# Altium PCB Ad Hoc Node PCB.PcbDoc
Units mm, origin at the board's own origin, x right, y up, seen from the top; angles counter-clockwise.
Board outline 152.4 x 101.6 mm, 2 copper layers (Top Layer, Bottom Layer); 32 components, 35 nets, 162 pads, 14 vias.
Unrouted connection lines stored in the file: 5.
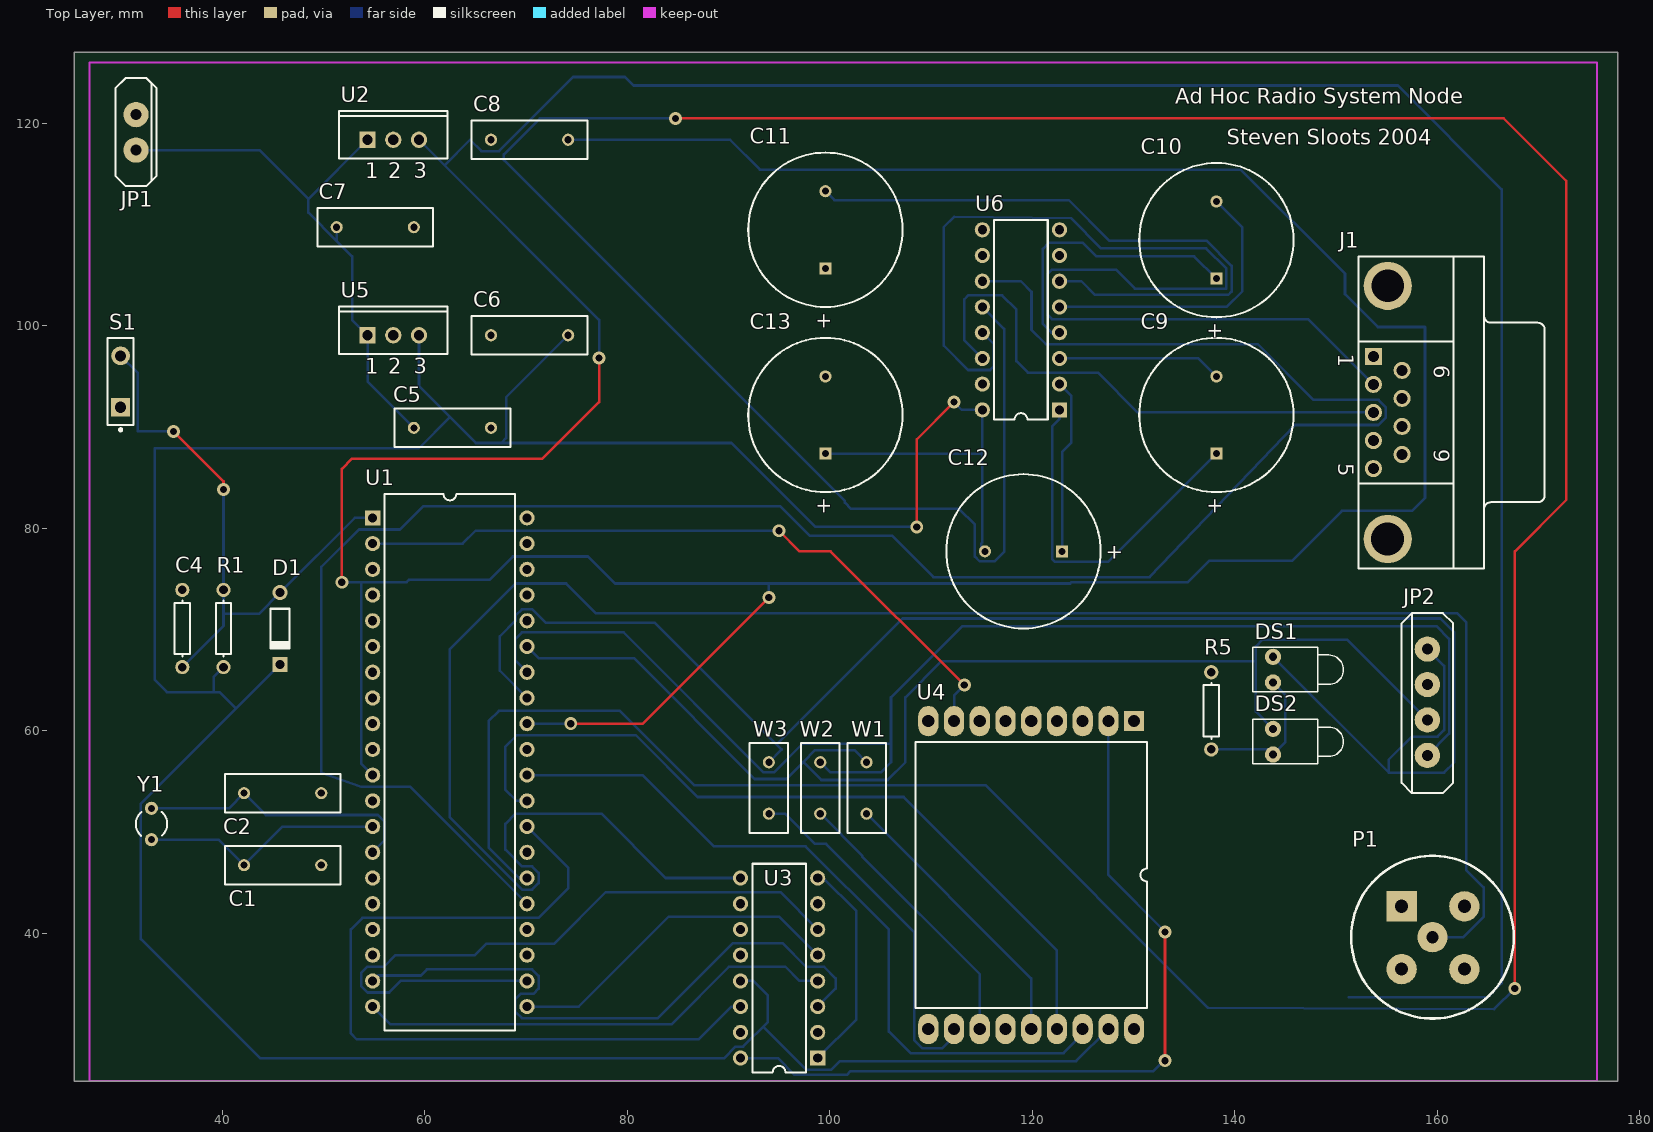
[diagram p0: Top Layer view]
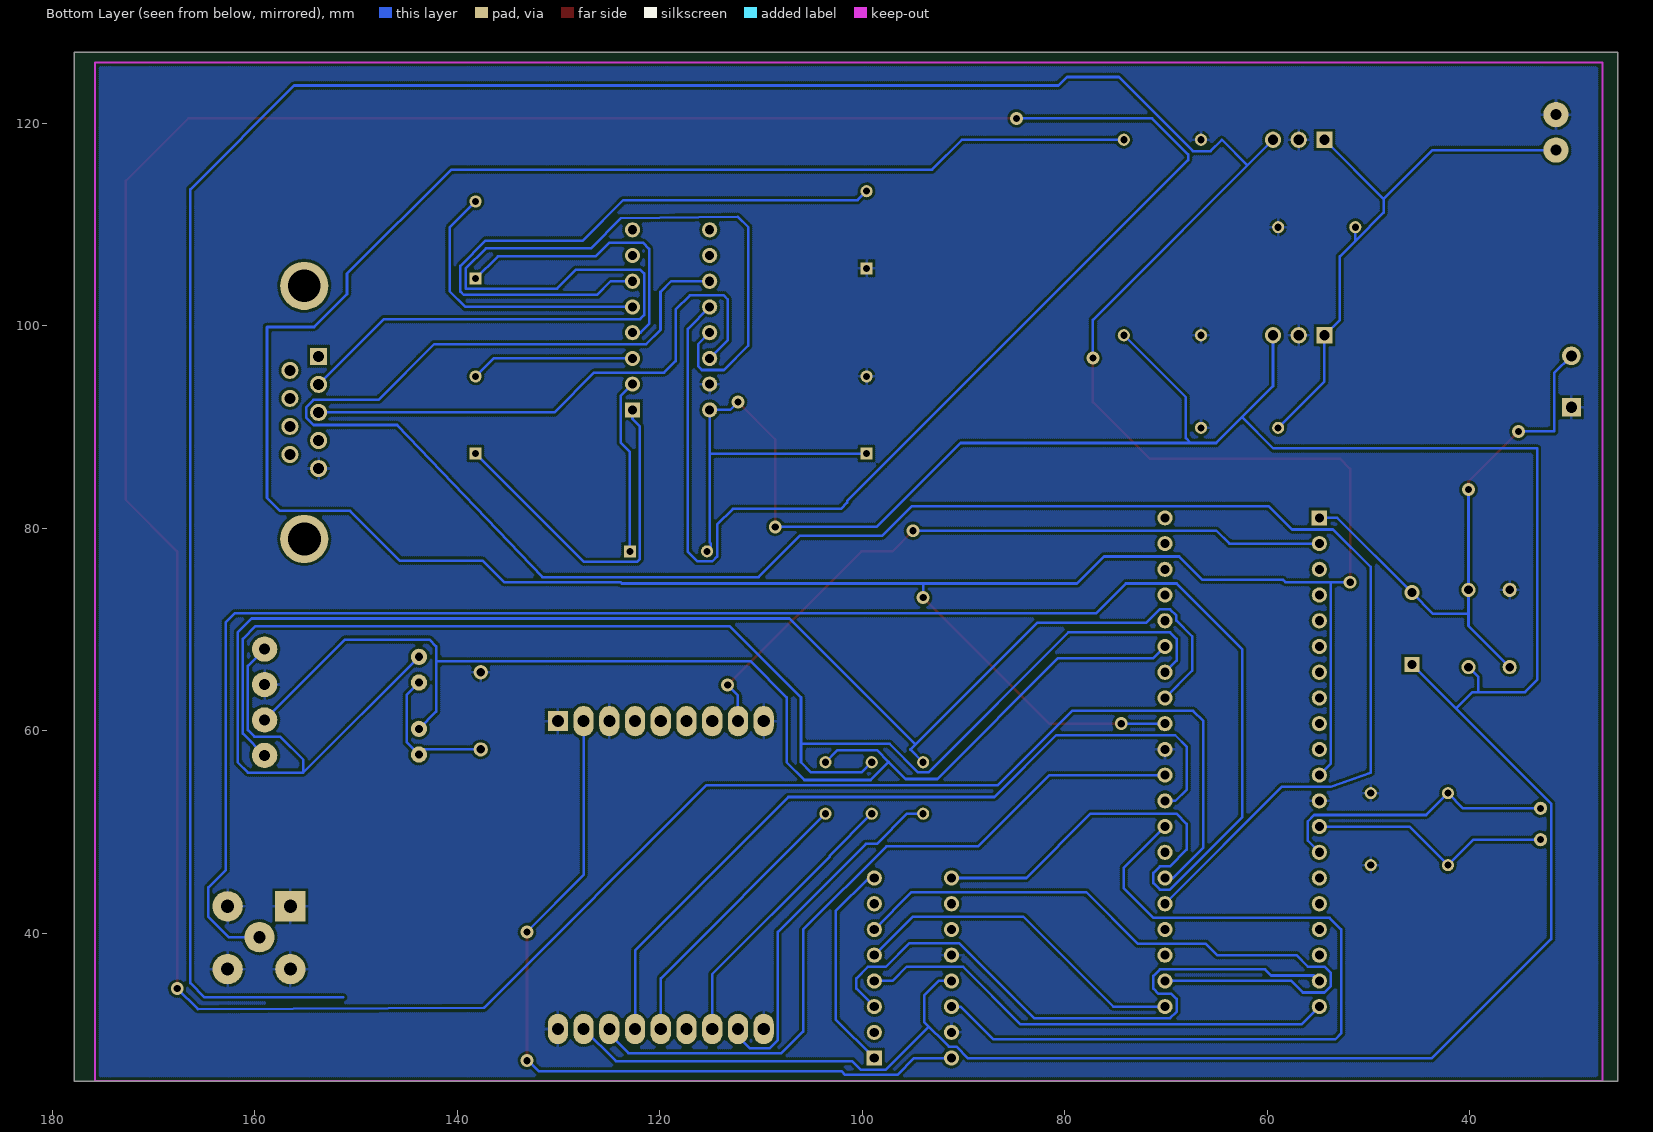
[diagram p1: Bottom Layer view, seen from below]

## Layer stack, top to bottom
Top Layer: signal copper 0.0356
Dielectric: dielectric 0.32, FR-4, Dk 4.8
Bottom Layer: signal copper 0.0356

## Board outline
25.4,25.4 177.8,25.4 177.8,127 25.4,127

## Design rules (kind name [scope] priority, off if disabled: settings)
Clearance [All] p1: gap=0.254
ComponentClearance [All] p1: gap=0.254 collisioncheckmode=0
HoleSize [All] p1: absolutevalues=TRUE maxlimit=5 minlimit=0.025 maxpercent=80.000 minpercent=20.000
PermittedLayers PermittedLayers_1 [All] p1: toplayerpermitted=FALSE bottomlayerpermitted=TRUE
PolygonConnect [All] p1: connectstyle=Relief reliefconductorwidth=0.254 reliefentries=4 polygonreliefangle="90 Angle"
RoutingLayers [All] p1: top layer="Not Used" bottom layer=Any
RoutingVias [All] p1: holewidth=0.711 width=1.27 viastyle="Through Hole" minholewidth=0.711 minwidth=1.27 maxholewidth=0.711 maxwidth=1.27
SolderMaskExpansion [All] p1: expansion=0.102
TestPointUsage [All] p1: valid=0 allowmultiple=FALSE
Testpoint [All] p1: side=15 testpointundercomponent=TRUE minsize=1.016 maxsize=2.54 preferedsize=1.524 minholesize=0 maxholesize=1.016 preferedholesize=0.813 testpointgrid=0.025 style=1023 order=1234567890
Width [All] p1: maxlimit=0.35 minlimit=0.254 preferedwidth=0.254 minimp=50.000000 maximp=50.000000 favimp=50.000000
15 further rules are at their usual default settings.

## Components (designator, comment, footprint, x,y, rotation, side; value= is the part's Value field where it differs from the comment)
C1 "Cap" RAD-0.3 42.164,46.736 r0 top
C2 "Cap" RAD-0.3 42.164,53.848 r0 top
C4 "1uF" AXIAL-0.3 36.068,70.104 r90 top
C5 "Cap" RAD-0.3 58.928,89.916 r0 top
C6 "Cap" RAD-0.3 74.168,99.06 r180 top
C7 "Cap" RAD-0.3 51.308,109.728 r0 top
C8 "Cap" RAD-0.3 74.168,118.364 r180 top
C9 "Cap Pol1" RB7.6-15 138.176,87.376 r270 top
C10 "Cap Pol1" RB7.6-15 138.176,104.648 r270 top
C11 "Cap Pol1" RB7.6-15 99.568,105.664 r270 top
C12 "Cap Pol1" RB7.6-15 122.936,77.724 r0 top
C13 "Cap Pol1" RB7.6-15 99.568,87.376 r270 top
D1 "Diode" DIO7.1-3.9X1.9 45.72,70.104 r270 top
DS1 "LED1" LED-1 143.764,66.04 r0 top
DS2 "LED1" LED-1 143.764,58.928 r0 top
J1 "D Connector 9" DSUB1.385-2H9 164.592,91.44 r270 top
JP1 "Power In" "PCBComponent_1 - duplicate1" 31.496,117.348 r90 top
JP2 "Header 4" "4 Way Terminal Block" 159.004,68.072 r270 top (schematic designator JP1)
P1 "BNC" "PCB BNC Connector - duplicate" 156.464,42.672 r0 top
R1 "Res1" AXIAL-0.3 40.132,70.104 r270 top
R5 "Res1" AXIAL-0.3 137.668,61.976 r90 top
S1 "SW-PB" SPST-2 29.972,94.488 r90 top
U1 "PIC18C452/JW" DIP-40/D53 62.484,56.896 r270 top
U2 "LM340T5.0" SFM-T3/A4.7V 56.896,118.364 r0 top
U3 "AD8369" DIP-16 94.996,36.576 r90 top
U4 "X2010 NBFM Transceiver" X2010 130.048,60.96 r270 top
U5 "LM340T5.0" SFM-T3/A4.7V 56.896,99.06 r0 top
U6 "MAX232EPE" DIP-16/X1.5 118.872,100.584 r90 top
W1 "Tx Jumper" RAD-0.2 103.632,56.896 r270 top
W2 "Rx Jumper" RAD-0.2 99.06,56.896 r270 top
W3 "CD Jumper" RAD-0.2 93.98,56.896 r270 top
Y1 "XTAL" BCY-W2/D3.1 33.02,50.8 r180 top

## Footprints (in the part's own frame and the unit in brackets; to place one, negate y for a bottom-side part, rotate by r counter-clockwise, add the part's x,y. Pads: shape width x height; smd on the part's side, far side on the other; paste and mask are expansions set on the pad)
"4 Way Terminal Block" [mm]
  round 2.5 hole 1.1: 0(0,0) 1(3.5,0) 2(7,0) 3(10.5,0)
  silkscreen extent -3.56,-2.54 14.22,2.54
AXIAL-0.3 [mm]
  round 1.4 hole 0.85: 1(-3.81,0) 2(3.81,0)
  silkscreen extent -2.77,-0.76 2.77,0.76
BCY-W2/D3.1 [mm]
  round 1.3 hole 0.7: 1(0,1.55) 2(0,-1.55)
  silkscreen extent -1.55,-1.19 1.55,1.17
DIO7.1-3.9X1.9 [mm]
  round 1.5 hole 0.9: 1(-3.55,0)
  rect 1.5x1.5 hole 0.9: 2(3.55,0)
  silkscreen extent -1.95,-0.95 2.05,0.95
DIP-16 [mm]
  rect 1.5x1.5 hole 0.9: 1(-8.89,-3.81)
  round 1.5 hole 0.9: 2(-6.35,-3.81) 3(-3.81,-3.81) 4(-1.27,-3.81) 5(1.27,-3.81) 6(3.81,-3.81) 7(6.35,-3.81) 8(8.89,-3.81) 9(8.89,3.81) 10(6.35,3.81) 11(3.81,3.81) 12(1.27,3.81) 13(-1.27,3.81) 14(-3.81,3.81) 15(-6.35,3.81) 16(-8.89,3.81)
  silkscreen extent -10.3,-2.65 10.3,2.65
DIP-16/X1.5 [mm]
  rect 1.5x1.5 hole 0.9: 1(-8.89,-3.81)
  round 1.5 hole 0.9: 2(-6.35,-3.81) 3(-3.81,-3.81) 4(-1.27,-3.81) 5(1.27,-3.81) 6(3.81,-3.81) 7(6.35,-3.81) 8(8.89,-3.81) 9(8.89,3.81) 10(6.35,3.81) 11(3.81,3.81) 12(1.27,3.81) 13(-1.27,3.81) 14(-3.81,3.81) 15(-6.35,3.81) 16(-8.89,3.81)
  silkscreen extent -9.85,-2.65 9.85,2.65
DIP-40/D53 [mm]
  rect 1.5x1.5 hole 0.9: 1(-24.13,-7.62)
  round 1.5 hole 0.9: 2(-21.59,-7.62) 3(-19.05,-7.62) 4(-16.51,-7.62) 5(-13.97,-7.62) 6(-11.43,-7.62) 7(-8.89,-7.62) 8(-6.35,-7.62) 9(-3.81,-7.62) 10(-1.27,-7.62) 11(1.27,-7.62) 12(3.81,-7.62) 13(6.35,-7.62) 14(8.89,-7.62) 15(11.43,-7.62) 16(13.97,-7.62) 17(16.51,-7.62) 18(19.05,-7.62) 19(21.59,-7.62) 20(24.13,-7.62) 21(24.13,7.62) 22(21.59,7.62) 23(19.05,7.62) 24(16.51,7.62) 25(13.97,7.62) 26(11.43,7.62) 27(8.89,7.62) 28(6.35,7.62) 29(3.81,7.62) 30(1.27,7.62) 31(-1.27,7.62) 32(-3.81,7.62) 33(-6.35,7.62) 34(-8.89,7.62) 35(-11.43,7.62) 36(-13.97,7.62) 37(-16.51,7.62) 38(-19.05,7.62) 39(-21.59,7.62) 40(-24.13,7.62)
  silkscreen extent -26.5,-6.45 26.5,6.45
DSUB1.385-2H9 [mm]
  rect 1.69x1.69 hole 1.09: 1(-5.54,-10.92)
  round 1.69 hole 1.09: 2(-2.77,-10.92) 3(0,-10.92) 4(2.77,-10.92) 5(5.54,-10.92) 6(-4.155,-8.08) 7(-1.385,-8.08) 8(1.385,-8.08) 9(4.155,-8.08)
  round 4.76 hole 3.2: 10(-12.495,-9.5)
  round 4.76 hole 3.26: 11(12.495,-9.5)
  silkscreen extent -15.4,-12.4 15.4,6
LED-1 [mm]
  round 1.6 hole 0.8: 1(0,1.27) 2(0,-1.27)
  silkscreen extent -2,-2.2 6.95,2.2
"PCB BNC Connector - duplicate" [mm]
  round 3 hole 1.2: 0(3.048,-3.048)
  rect 3x3 hole 1.3: 1(0,0)
  round 3 hole 1.3: 2(6.2,0) 3(0,-6.2) 4(6.2,-6.2)
  silkscreen extent -4.98,-11.08 11.08,4.98
"PCBComponent_1 - duplicate1" [mm]
  round 2.5 hole 1.1: 1(0,0) 2(3.5,0)
  silkscreen extent -3.56,-2.03 7.11,2.03
RAD-0.2 [mm]
  round 1.2 hole 0.7: 1(0,0) 2(5.08,0)
  silkscreen extent -1.91,-1.91 6.98,1.91
RAD-0.3 [mm]
  round 1.2 hole 0.7: 1(0,0) 2(7.62,0)
  silkscreen extent -1.91,-1.91 9.53,1.91
RB7.6-15 [mm]
  rect 1.2x1.2 hole 0.7: 1(0,0)
  round 1.2 hole 0.7: 2(-7.62,0)
  silkscreen extent -11.43,-7.62 3.81,7.62
SFM-T3/A4.7V [mm]
  rect 1.6x1.6 hole 1: 1(-2.54,0)
  round 1.6 hole 1: 2(0,0) 3(2.54,0)
  silkscreen extent -5.35,-1.85 5.35,2.85
SPST-2 [mm]
  rect 1.85x1.85 hole 1.1: 1(-2.54,0)
  round 1.85 hole 1.1: 2(2.54,0)
  silkscreen extent -4.89,-1.27 4.28,1.27
X2010 [mm]
  rect 2x2 hole 1.2: 1(0,0)
  oval 3x2 hole 1.2: 2(0,-2.54) 3(0,-5.08) 4(0,-7.62) 5(0,-10.16) 6(0,-12.7) 7(0,-15.24) 8(0,-17.78) 9(0,-20.32) 10(30.4,-20.32) 11(30.4,-17.78) 12(30.4,-15.24) 13(30.4,-12.7) 14(30.4,-10.16) 15(30.4,-7.62) 16(30.4,-5.08) 17(30.4,-2.54) 18(30.4,0)
  silkscreen extent 2.08,-21.59 28.32,1.27

## Part data
C1 C2 C6 C7 C8: "Capacitor"
C4 C5: library part "Cap Pol1", "Polarized Capacitor (Radial)"
C9 C10 C11 C12 C13: "Polarized Capacitor (Radial)"
D1: "Default Diode"
DS1 DS2: "Typical RED GaAs LED"
J1: "Receptacle Assembly, 9 Position, Right Angle"
JP1 JP2: library part "Header 2H", "Header, 2-Pin,  Right Angle"
P1: "BNC Elbow Connector"
R1 R5: "Resistor"
S1: "Switch"
U1: library part PIC16C74I/JW, "EPROM-Based 8-Bit CMOS Microcontroller with A/D Converter"
U2: library part MC34063AP1, "DC-to-DC Converter Control Circuit"
U3: library part AD8369_DIGITAL_CONT_PWR_AMP
U4: library part NBFM_TRANSCEIVER
U5: "Series 3-Terminal Positive Regulator"
U6: "+5V Powered RS-232 Driver/Receiver"
W1 W2 W3: library part Jumper, "Jumper Wire"
Y1: "Crystal Oscillator"

## Via types
v1: diameter 1.27, hole 0.711, Top Layer to Bottom Layer, 14 vias

## Nets (pads, with @x,y where several pads share a name; then routed paths per layer and width w, separated by ;. In a path a pad name is that pad's centre, name@x,y a point inside that pad or via, vN(x,y) a via of type N, cw(c..) or ccw(c..) an arc to the next point about the centre after c; other vN are vias at no path point)
GND: C1.2 C2.2 C4.2 C5.2 C6.2 C7.2 C8.2 C11.1 C13.2 J1.5 JP1.2 JP2.1 P1.1 P1.2 P1.3 P1.4 R5.2 S1.1 U1.12 U1.31 U2.2 U3.12 U3.15 U4.1 U4.3 U4.9 U4.10 U4.18 U5.2 U6.15
NetC1_1: C1.1 U1.13 Y1.1 | length 24.5
  Bottom Layer w0.254: Y1.1 39.65,49.25 C1.1 45.974,50.546 U1.13
NetC2_1: C2.1 U1.14 Y1.2 | length 28.3
  Bottom Layer w0.254: Y1.2 40.666,52.35 C2.1 44.323,51.689 55.372,51.689 56.007,51.054 56.007,49.149 U1.14
NetC4_1: C4.1 D1.1 R1.1 S1.2 U1.1 | length 57.4
  Top Layer w0.254: v1(35.204,89.56) 40.132,84.633 v1(40.132,83.82)
  Bottom Layer w0.254: S1.2 31.674,95.326 31.674,89.56 v1(35.204,89.56) ; C4.1 40.132,70.358 v1(40.132,83.82) ; 40.132,71.552 43.618,71.552 D1.1 53.092,81.026 U1.1
NetC5_1: C5.1 C7.1 JP1.1 U2.1 U5.1 | length 55.5
  Bottom Layer w0.254: JP1.1 43.688,117.348 48.514,112.522 ; C7.1 51.308,108.382 ; U2.1 48.514,112.522 ; C5.1 54.356,94.488 U5.1 52.832,100.584 52.832,106.858 51.308,108.382 ; 48.514,112.522 48.514,111.176 51.308,108.382
NetC9_1: C9.1 U6.1 | length 35.8
  Bottom Layer w0.254: U6.1 122.682,90.805 121.945,90.068 121.945,76.962 122.225,76.683 127.483,76.683 C9.1
NetC9_2: C9.2 U6.3 | length 16.2
  Bottom Layer w0.254: U6.3 136.398,96.774 C9.2
NetC10_1: C10.1 U6.4 | length 28.3
  Bottom Layer w0.254: U6.4 121.895,99.314 121.031,100.178 121.031,107.594 121.641,108.204 124.968,108.204 126.314,106.858 135.966,106.858 C10.1
NetC10_2: C10.2 U6.5 | length 28.6
  Bottom Layer w0.254: U6.5 139.192,101.854 140.741,103.403 140.741,109.703 C10.2
NetC11_2: C11.2 U6.6 | length 63.4
  Bottom Layer w0.254: C11.2 100.457,112.395 123.596,112.395 127.584,108.407 137.185,108.407 139.675,105.918 139.675,103.378 139.344,103.048 126.187,103.048 124.841,104.394 U6.6
NetC12_1: C12.1 U6.2 | length 17.4
  Bottom Layer w0.254: U6.2 123.825,93.091 123.825,88.443 122.936,87.554 C12.1
NetDS1_1: DS1.1 JP2.0 U1.33 W3.1 | length 169.1
  Bottom Layer w0.254: U1.33 67.412,65.938 67.412,69.317 68.973,70.878 68.973,71.374 69.596,71.997 70.624,71.997 71.958,70.663 82.728,70.663 95.237,58.153 W3.1 ; 94.742,58.649 107.188,71.095 160.299,71.095 161.671,69.723 161.671,56.896 160.655,55.88 155.194,55.88 ; DS1.1 155.194,55.88 ; JP2.0 160.655,66.421 160.655,60.071 160.02,59.436 157.48,59.436 155.194,57.15 155.194,55.88
NetDS1_2: DS1.2 DS2.2 R5.1 | length 14.7
  Bottom Layer w0.254: R5.1 143.764,58.166 DS2.2 144.958,58.852 144.958,63.576 DS1.2
NetDS2_1: DS2.1 JP2.2 U1.35 W1.1 | length 124
  Bottom Layer w0.254: U1.35 71.247,67.183 80.645,67.183 92.583,55.245 95.707,55.245 97.384,56.921 ; W1.1 102.438,58.09 98.552,58.09 97.384,56.921 ; DS2.1 142.062,61.9 142.062,66.878 ; JP2.2 151.064,69.012 142.748,69.012 142.062,68.326 142.062,66.878 ; 97.384,56.921 99.162,55.143 105.715,55.143 107.467,56.896 107.467,63.297 111.049,66.878 142.062,66.878
NetJ1_2: J1.2 U6.13 | length 111.6
  Bottom Layer w0.254: U6.13 116.205,98.171 116.205,96.012 115.824,95.631 113.665,95.631 111.252,98.044 111.252,109.728 112.268,110.744 123.825,110.617 126.797,107.645 137.16,107.645 139.167,105.639 139.167,103.657 130.124,103.657 128.245,105.537 121.92,105.537 121.539,105.156 121.539,101.041 121.92,100.66 147.222,100.66 J1.2
NetJ1_3: J1.3 U6.14 | length 54.9
  Bottom Layer w0.254: U6.14 113.284,98.552 113.284,102.616 113.665,102.997 117.018,102.997 118.415,101.6 118.415,96.52 119.558,95.377 126.467,95.377 130.404,91.44 J1.3
NetJP2_3: JP2.3 U1.34 W2.1 | length 133.2
  Bottom Layer w0.254: U1.34 68.961,66.929 68.961,69.088 69.596,69.723 79.654,69.723 93.472,55.905 94.488,55.905 97.307,58.725 106.045,58.725 ; W2.1 100.051,55.905 105.054,55.905 106.045,56.896 106.045,58.725 ; JP2.3 161.163,59.731 161.163,69.088 159.918,70.333 113.081,70.333 106.045,63.297 106.045,58.725
NetP1_1: P1.0 U3.9 | length 203
  Bottom Layer w0.254: U3.9 83.795,45.466 77.445,51.816 68.986,51.816 67.97,50.8 67.97,48.26 69.621,46.609 70.612,46.609 71.247,45.974 71.247,44.958 70.612,44.323 69.621,44.323 62.484,51.46 62.484,68.072 68.961,74.549 73.965,74.549 76.911,71.603 161.976,71.603 162.839,70.739 162.839,46.279 164.567,44.552 164.567,41.631 162.56,39.624 P1.0
NetU1_2: U1.2 U4.8 | length 69.2
  Top Layer w0.254: v1(94.996,79.756) 97.028,77.724 100.076,77.724 v1(113.284,64.516)
  Bottom Layer w0.254: U1.2 63.754,78.486 65.024,79.756 v1(94.996,79.756) ; U4.8 112.268,63.5 v1(113.284,64.516)
NetU1_19: U1.19 U3.3 | length 62.3
  Bottom Layer w0.254: U1.19 55.397,35.839 59.614,35.839 60.223,36.449 70.612,36.449 71.247,35.814 71.247,34.544 70.739,34.036 69.469,34.036 68.961,33.528 68.961,32.258 69.596,31.623 83.033,31.623 90.449,39.04 95.326,39.04 97.663,36.703 99.441,36.703 100.584,35.56 100.584,34.544 U3.3
NetU1_20: U1.20 U3.4 | length 47.6
  Bottom Layer w0.254: U1.20 56.617,31.013 84.353,31.013 90.043,36.703 95.606,36.703 97.003,35.306 U3.4
NetU1_21: U1.21 U3.5 | length 34
  Bottom Layer w0.254: U1.21 75.209,32.766 84.099,41.656 94.996,41.656 U3.5
NetU1_22: U1.22 U3.6 | length 68.3
  Bottom Layer w0.254: U1.22 57.633,35.306 56.49,34.163 54.356,34.163 53.721,34.798 53.721,36.08 54.356,36.715 56.007,36.715 57.138,37.846 64.948,37.846 66.091,38.989 72.796,38.989 77.876,44.069 95.123,44.069 U3.6
NetU1_25: U1.25 U6.11 | length 211.1
  Bottom Layer w0.254: U1.25 58.547,54.483 53.721,54.483 49.784,55.88 49.784,76.2 53.518,79.883 57.556,79.883 59.868,82.194 95.098,82.194 98.044,79.248 106.172,79.248 110.236,75.184 131.572,75.184 145.923,90.195 154.161,90.195 154.915,90.949 154.915,91.948 154.178,92.685 147.752,92.685 142.265,98.171 121.336,98.171 119.913,99.593 119.913,103.353 118.872,104.394 U6.11
NetU1_26: U1.26 U6.12 | length 416.8
  Top Layer w0.254: v1(84.76,120.472) 166.548,120.472 172.72,114.3 172.72,82.804 167.64,77.724 v1(167.64,34.544)
  Bottom Layer w0.254: U1.26 69.317,45.466 66.319,48.463 66.319,60.96 67.335,61.976 79.273,61.976 86.614,54.635 115.367,54.635 137.363,32.639 165.608,32.512 v1(167.64,34.544) ; v1(84.76,120.472) 71.374,120.472 67.818,116.916 67.818,116.357 101.48,82.695 101.48,82.543 102.108,81.915 112.776,81.915 114.325,80.366 114.325,77.216 114.808,76.733 116.281,76.733 117.221,77.673 117.221,99.695 U6.12
NetU1_28: U1.28 U3.14 | length 81.2
  Bottom Layer w0.254: U1.28 74.168,46.482 74.168,44.45 71.247,41.529 53.848,41.529 52.705,40.386 52.705,30.124 53.289,29.54 87.046,29.54 90.272,32.766 U3.14
NetU1_29: U1.29 U4.15 | length 78.3
  Bottom Layer w0.254: U1.29 69.088,53.086 67.945,54.229 67.945,58.42 69.088,59.563 80.848,59.563 86.944,53.467 107.29,53.467 122.428,38.329 U4.15
NetU1_30: U1.30 U4.16 | length 73.4
  Bottom Layer w0.254: U1.30 81.509,55.626 88.544,48.59 97.612,48.59 105.842,40.361 105.842,30.302 107.975,28.169 123.088,28.169 124.968,30.048 U4.16
NetU3_1: U3.1 U3.8 | length 21.2
  Bottom Layer w0.254: U3.1 102.616,31.496 102.616,42.189 99.339,45.466 U3.8
NetU3_16: U3.16 U4.2 | length 79.2
  Top Layer w0.254: v1(133.096,27.432) v1(133.096,40.132)
  Bottom Layer w0.254: U3.16 94.869,27.686 96.52,26.035 101.676,26.035 102.006,26.365 131.902,26.365 v1@133.172,27.635 ; U4.2 127.508,45.771 v1@133.172,40.107
NetU4_11: U4.11 W3.2 | length 35.4
  Bottom Layer w0.254: W3.2 95.555,51.816 98.527,48.844 99.644,48.844 108.331,40.157 108.331,29.464 109.118,28.677 111.125,28.677 112.268,29.82 U4.11
NetU4_12: U4.12 W2.2 | length 27.8
  Bottom Layer w0.254: W2.2 103.226,47.65 103.226,47.549 114.808,35.966 U4.12
NetU4_14: U4.14 W1.2 | length 28
  Bottom Layer w0.254: W1.2 119.888,35.56 U4.14
VCC: C6.1 C12.2 C13.1 D1.2 R1.2 U3.13 U4.17 U5.3 U6.16 | length 329.8
  Top Layer w0.254: v1(108.585,80.137) 108.585,88.773 v1(112.268,92.456)
  Bottom Layer w0.254: 39.154,63.83 39.154,65.316 R1.2 ; 41.367,62.201 39.738,63.83 34.544,63.83 33.35,65.024 33.35,87.884 59.411,87.884 62.497,90.97 ; D1.2 31.979,52.813 31.979,39.446 43.764,27.661 89.535,27.661 90.691,28.817 91.44,28.817 93.878,31.255 93.878,33.884 92.456,35.306 U3.13 ; U5.3 59.436,94.031 65.049,88.417 90.297,88.417 98.577,80.137 v1(108.585,80.137) ; 67.564,88.417 68.047,88.9 68.047,92.939 C6.1 ; 93.414,30.792 97.663,26.543 100.152,26.543 100.99,27.381 124.329,27.381 U4.17 ; C13.1 115.062,87.376 ; v1(112.268,92.456) 113.03,91.694 U6.16 115.062,78.613 114.935,78.486 114.935,78.105 C12.2
VDD: C8.1 U1.11 U1.32 U2.3 | length 553.1
  Top Layer w0.254: v1(51.816,74.676) 51.816,85.852 52.832,86.868 71.628,86.868 77.216,92.456 v1(77.216,96.799) ; v1(74.422,60.706) 81.534,60.706 v1(93.98,73.152)
  Bottom Layer w0.254: v1(51.816,74.676) 58.217,74.676 58.445,74.905 66.396,74.905 68.707,77.216 76.124,77.216 78.791,74.549 123.723,74.549 123.85,74.676 135.357,74.676 137.49,76.81 145.669,76.81 150.571,81.712 157.48,81.712 158.775,83.007 158.775,99.879 154.121,99.879 150.876,103.124 150.876,105.156 140.564,115.418 93.091,115.418 90.145,118.364 C8.1 ; 53.721,74.676 53.721,56.769 U1.11 ; U2.3 77.216,100.584 v1(77.216,96.799) ; 61.963,115.837 64.491,118.364 65.608,117.246 67.335,117.246 74.651,124.562 79.781,124.562 80.62,123.723 156.083,123.723 166.345,113.462 166.345,35.077 164.948,33.68 151.232,33.68 ; U1.32 v1(74.422,60.706) ; v1(93.98,73.152) 93.98,74.549
pads on no net: J1.1 J1.4 J1.6 J1.7 J1.8 J1.9 J1.10 J1.11 U1.3 U1.4 U1.5 U1.6 U1.7 U1.8 U1.9 U1.10 U1.15 U1.16 U1.17 U1.18 U1.23 U1.24 U1.27 U1.36 U1.37 U1.38 U1.39 U1.40 U3.2 U3.7 U3.10 U3.11 U4.4 U4.5 U4.6 U4.7 U4.13 U6.7 U6.8 U6.9 U6.10

## Polygon pours and split planes (outlines as drawn)
GND on Bottom Layer (hatched 90Degree grid 0.2 track 0.3): 26.924,125.984 175.768,125.984 175.768,25.4 26.924,25.4

## Keep-outs
Keep-Out Layer:
  lines w0.2: 26.924,25.4 175.768,25.4 175.768,125.984 26.924,125.984 26.924,25.4

## Silkscreen, mask and mechanical layers (free items; w line width, h text height)
Top Overlay:
  text "Ad Hoc Radio System Node" at 134.112,121.92 h1.52
  text "Steven Sloots 2004" at 139.192,117.856 h1.52

## Text inside footprints (layer, text, board x,y; h text height)
C9: Top Overlay "+" at 137.439,83.054 h1.5 r270
C10: Top Overlay "+" at 137.439,100.326 h1.5 r270
C11: Top Overlay "+" at 98.831,101.342 h1.5 r270
C12: Top Overlay "+" at 127.258,76.987 h1.5
C13: Top Overlay "+" at 98.831,83.054 h1.5 r270
J1: Top Overlay "1" at 150.217,97.23 h1.5 r270; Top Overlay "5" at 150.217,86.4 h1.5 r270; Top Overlay "9" at 159.617,87.785 h1.5 r270; Top Overlay "6" at 159.617,96.095 h1.5 r270
U2: Top Overlay "2" at 56.396,114.539 h1.5; Top Overlay "1" at 54.106,114.539 h1.5; Top Overlay "3" at 58.936,114.539 h1.5
U5: Top Overlay "3" at 58.936,95.235 h1.5; Top Overlay "1" at 54.106,95.235 h1.5; Top Overlay "2" at 56.396,95.235 h1.5